# EAGLE board oneboard6 (EAGLE 7.5.0)
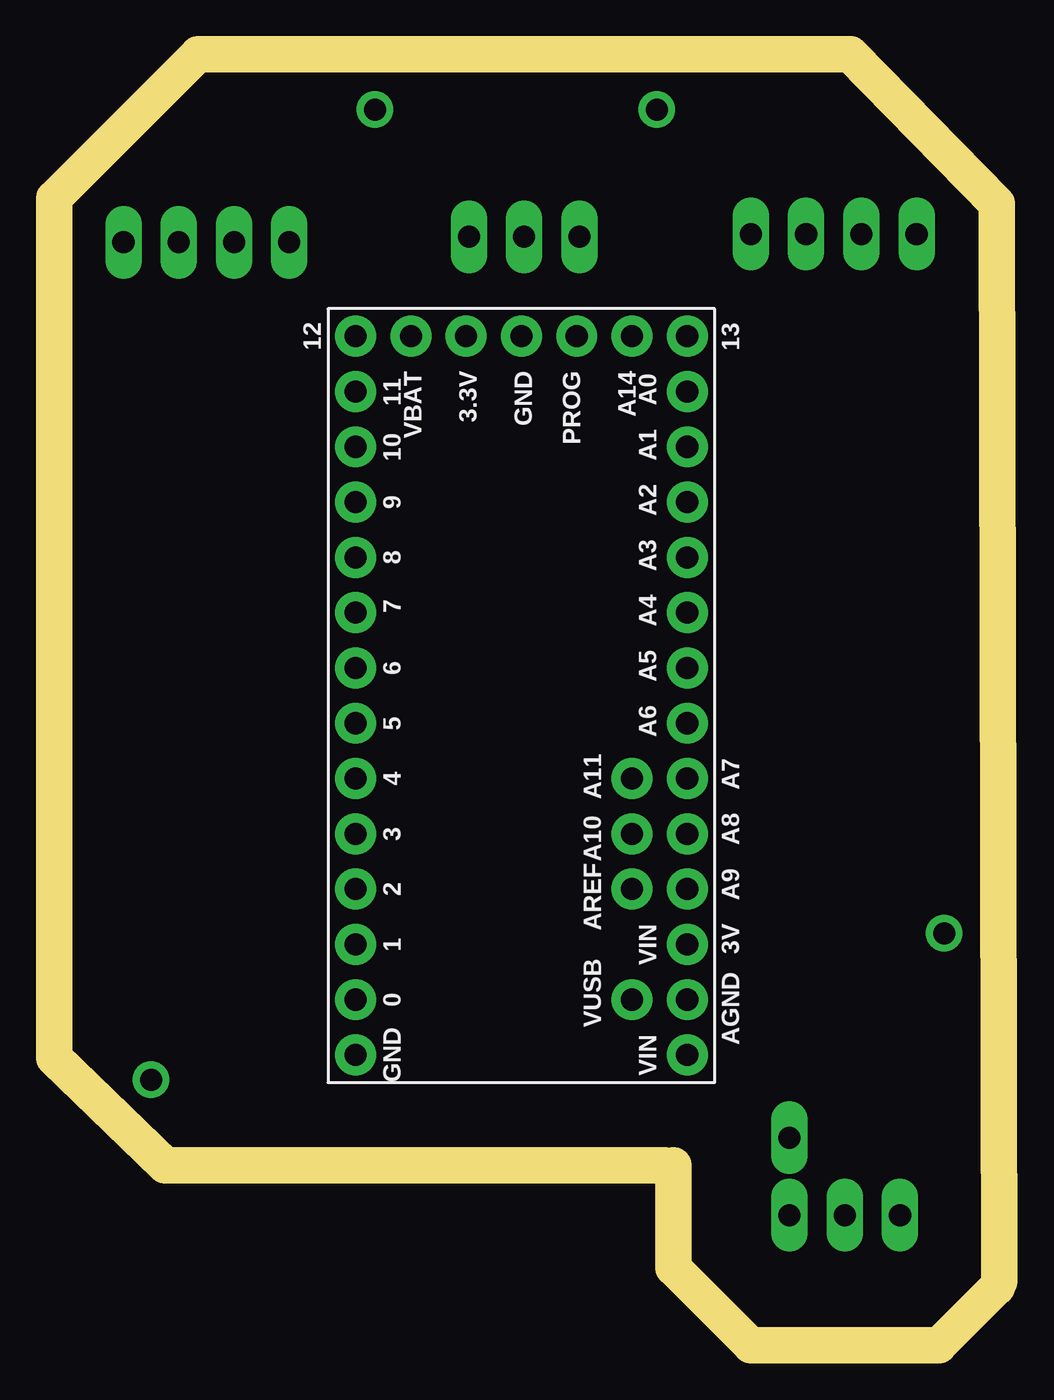
[diagram p0: board, top side]
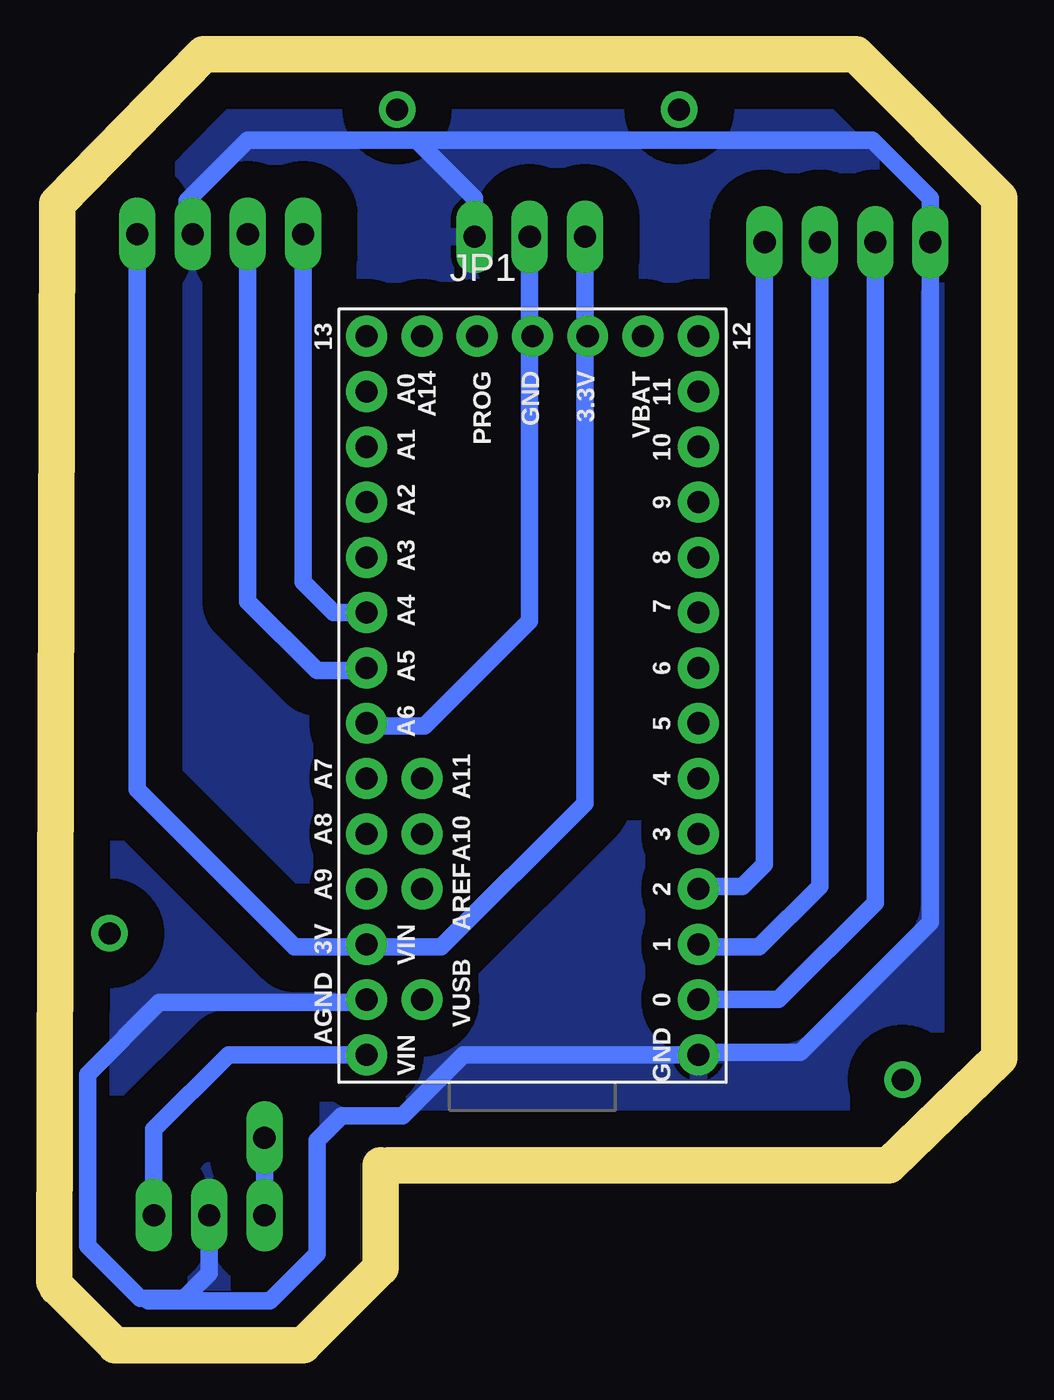
[diagram p1: board, bottom side, seen from below]

Size 43.43 x 59.31 mm. Coordinates in mm from the lower left corner, seen from the top.
Outline: 28.07,8.25 5.08,8.25 0,13.21 0,52.7 6.6,59.31 36.58,59.31 43.31,52.45 43.43,2.92
Outline: 28.45,8.25 28.45,3.56 32,0 40.64,0 43.31,2.67
Copper layers (1*16): Top 0.035mm / dielectric 1.5mm / Bottom 0.035mm
Design rules "default": minimum track width 10mil, minimum drill 24mil, track to track 8mil, track to pad 8mil, pad to pad 8mil, via to via 8mil, smd to smd 8mil, copper to edge 40mil, drill to drill 8mil, minimum pad ring 10mil, minimum via ring 8mil, stop-mask expansion 4mil, vias tented up to drill 0mil, thermal gap 10mil

## Footprints (pad centres in the part's own frame; a part is rotated, then mirrored left to right if it is on the bottom)
TEENSY-3.1 = drill 1.016 pad 1.88: 0 16.51,3.81; 1 16.51,6.35; 2 16.51,8.89; 3 16.51,11.43; 3.3V 11.43,34.29; 3V 1.27,6.35; 4 16.51,13.97; 5 16.51,16.51; 6 16.51,19.05; 7 16.51,21.59; 8 16.51,24.13; 9 16.51,26.67; 10 16.51,29.21; 11 16.51,31.75; 12 16.51,34.29; 13 1.27,34.29; 14 1.27,31.75; 15 1.27,29.21; 16 1.27,26.67; 17 1.27,24.13; 18 1.27,21.59; 19 1.27,19.05; 20 1.27,16.51; 21 1.27,13.97; 22 1.27,11.43; 23 1.27,8.89; A10 3.81,11.43; A11 3.81,13.97; A14/DAC 3.81,34.29; AGND 1.27,3.81; AREF 3.81,8.89; GND 8.89,34.29; GND1 16.51,1.27; PROG 6.35,34.29; VBAT 13.97,34.29; VIN 1.27,1.27; VUSB 3.81,3.81
HEADER-3 = drill 1.016 pad 1.676 long: 1 0,0; 2 0,2.54; 3 0,5.08
HEADER-1 = drill 1.016 pad 1.676 long: 1 0,0
HEADER-4 = drill 1.016 pad 1.676 long: 1 0,0; 2 0,2.54; 3 0,5.08; 4 0,7.62

## Placement (x,y rotation side)
JP1  TEENSY-3.1SILK  [TEENSY-3.1]  30.35,12.07 0 bottom
U$1  HEADER-3  [HEADER-3]  38.86,5.97 90 top
U$2  HEADER-3  [HEADER-3]  24.13,50.93 90 top
U$3  HEADER-1  [HEADER-1]  33.78,9.53 90 top
U$4  HEADER-4  [HEADER-4]  39.62,51.05 90 top
U$5  HEADER-4  [HEADER-4]  10.79,50.67 90 top

## Library data of the parts
JP1 = SparkFun-Boards; SF_ID: DEV-12646
U$1-U$5 = homemade-hardware

## Nets
GND: JP1.AGND JP1.GND1 U$1.2 U$2.1 U$4.2 U$5.4
N$1: JP1.1 U$5.2
N$2: JP1.0 U$5.3
N$4: JP1.2 U$5.1
N$6: U$1.3 U$3.1
NEO: JP1.20 U$2.2
SCL: JP1.19 U$4.3
SDA: JP1.18 U$4.4
VCC: JP1.3V U$2.3 U$4.1
VIN: JP1.VIN U$1.1

## Tracks (layer width: path | path; a pad name or v marks a point on that pad's centre or on a via)
GND
  Bottom 0.813: JP1.GND1 14.48,13.34 | 14.48,13.34 14.35,13.46 9.14,13.46 3.17,19.43 U$5.4 3.17,52.7 5.84,55.37 26.8,55.37 | 26.8,55.37 34.54,55.37 37.34,52.58 37.34,51.31 U$4.2 | U$2.1 24.13,52.7 26.8,55.37 | U$1.2 36.32,3.3 37.47,2.16 39.24,2.16 | 39.24,2.16 39.5,2.16 41.91,4.57 41.91,12.45 38.61,15.75 29.21,15.75 JP1.AGND | 14.48,13.34 24.64,13.34 27.43,10.54 30.23,10.54 31.37,9.4 31.37,4.19 33.53,2.03 39.12,2.03 39.24,2.16
  pour Bottom (isolate 1.676): -6.35,63.25 46.48,63.25 46.48,-2.92 -6.35,-2.92
N$1
  Bottom 0.813: U$5.2 8.25,21.08 11.05,18.29 13.72,18.29 JP1.1
N$2
  Bottom 0.813: U$5.3 5.71,20.32 10.16,15.88 JP1.0
N$3  (via drill 1 pad 1.68)
  other vias: 4.45,12.19
N$4
  Bottom 0.813: U$5.1 10.79,22.1 11.81,21.08 13.72,21.08 JP1.2
N$5  (via drill 1 pad 1.68)
  other vias: 40.89,18.92
N$6
  Bottom 0.813: U$3.1 U$1.3
N$7  (via drill 1 pad 1.68)
  other vias: 14.73,56.77
N$8  (via drill 1 pad 1.68)
  other vias: 27.69,56.77
NEO
  Bottom 0.813: U$2.2 21.59,33.27 26.42,28.45 28.96,28.45 JP1.20
SCL
  Bottom 0.813: U$4.3 34.54,34.16 31.37,30.99 29.21,30.99 JP1.19
SDA
  Bottom 0.813: U$4.4 32,35.05 30.61,33.66 JP1.18
VCC
  Bottom 0.813: U$2.3 19.05,24.89 25.65,18.29 28.96,18.29 JP1.3V 29.21,18.29 32.39,18.29 39.62,25.53 U$4.1
VIN
  Bottom 0.813: JP1.VIN 35.43,13.34 38.86,9.91 U$1.1